# Altium PCB PCB_FOCShield.PcbDoc
Units mm, origin at the board's own origin, x right, y up, seen from the top; angles counter-clockwise.
Board outline 50.65 x 75.84 mm, 2 copper layers (Top Layer, Bottom Layer), stack 1.595 mm thick; 64 components, 48 nets, 242 pads, 252 vias.
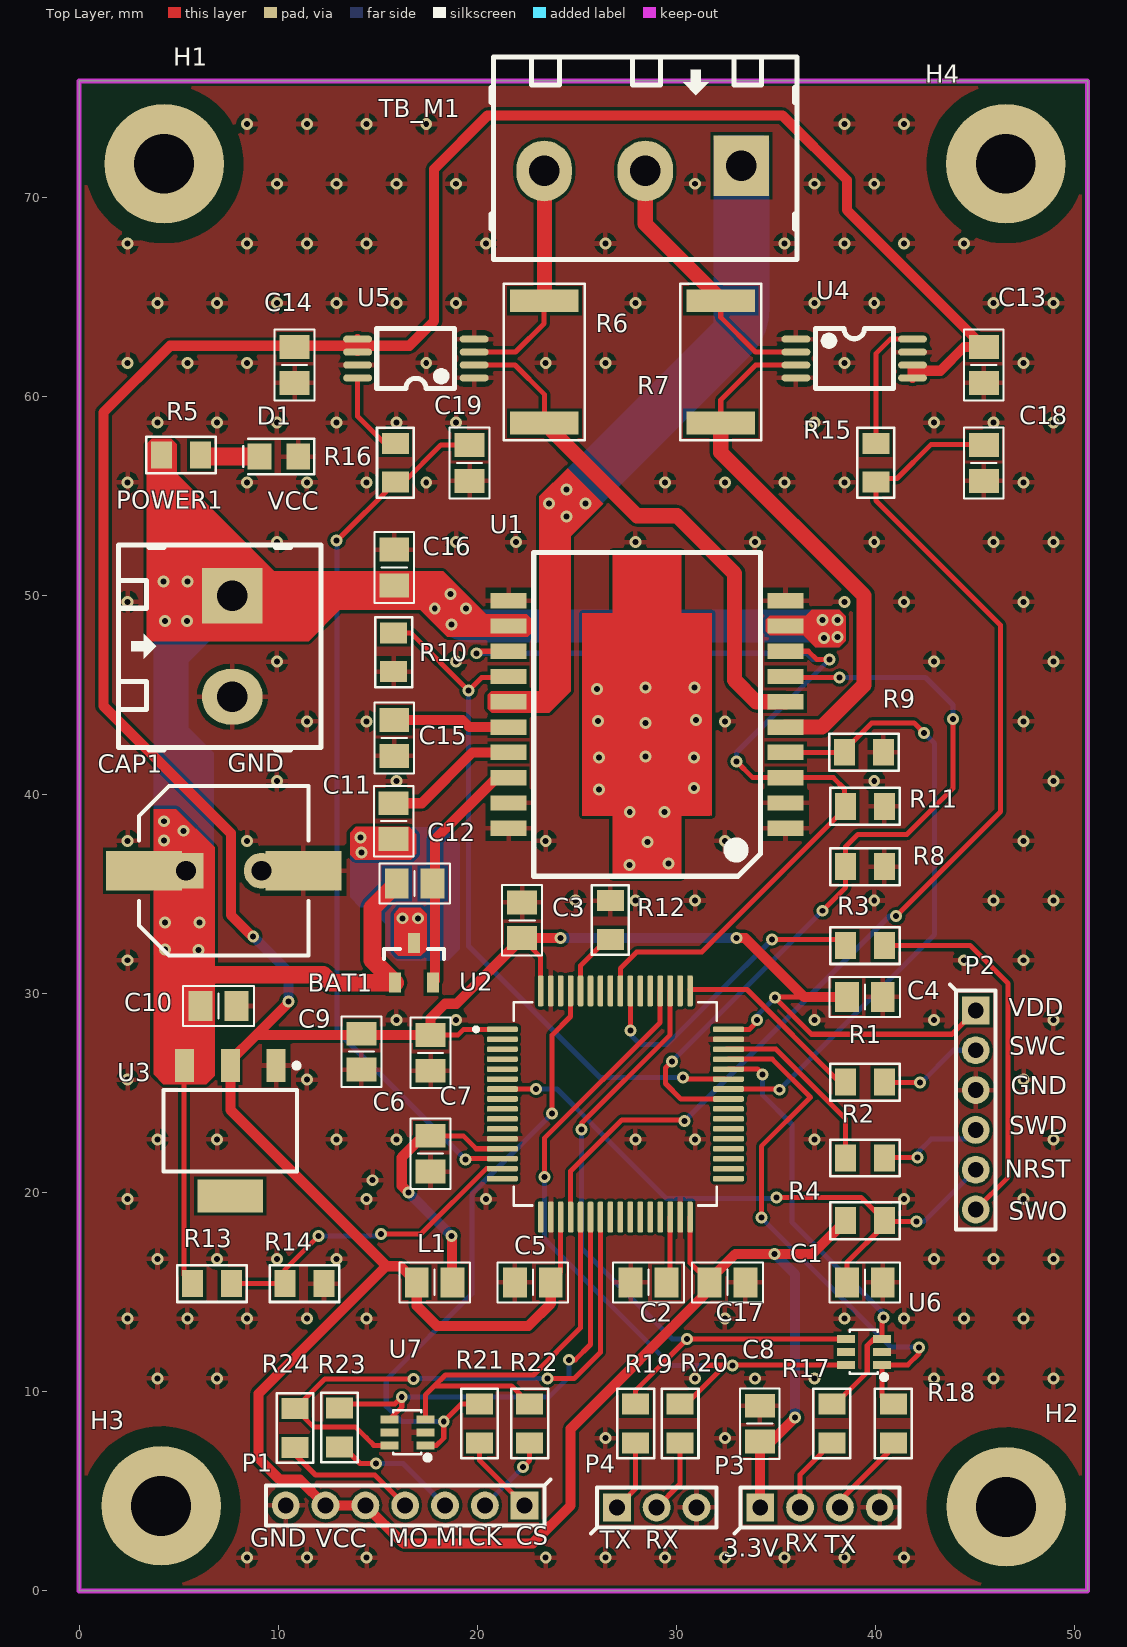
[diagram p0: Top Layer view]
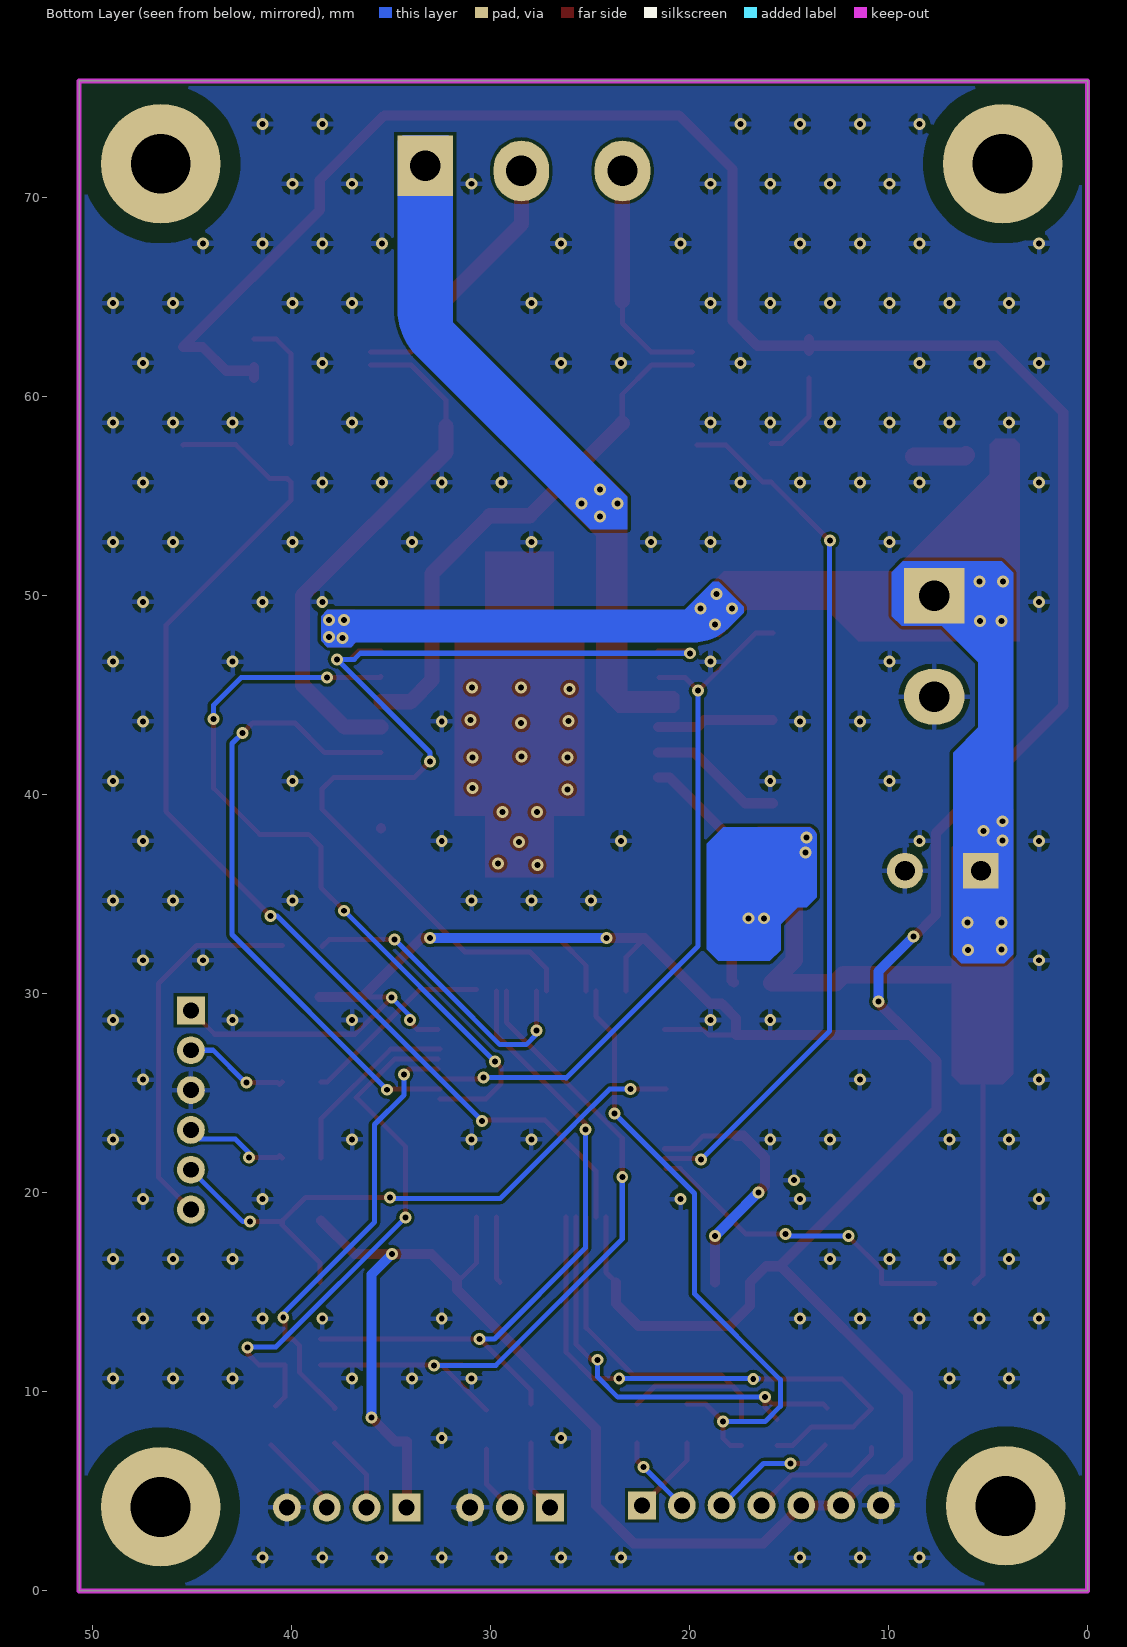
[diagram p1: Bottom Layer view, seen from below]

## Layer stack, top to bottom
Top Solder: solder mask 0.0356, Solder Resist, Dk 3.5
Top Layer: signal copper 0.0356
Dielectric 1: dielectric 1.524, FR-4, Dk 4.8
Bottom Layer: signal copper 0.0356
Bottom Solder: solder mask 0.0102, Solder Resist, Dk 3.5

## Board outline
0,0 0,75.844 50.648,75.844 50.648,0
cut-out: 50.648,71.882

## Design rules (kind name [scope] priority, off if disabled: settings)
Clearance [All] p1: gap=0.152 ignorepadtopadclearanceinfootprint=FALSE
HoleSize [All] p1: absolutevalues=TRUE maxlimit=3.81 minlimit=0.3 maxpercent=80.000 minpercent=20.000
MinimumSolderMaskSliver [All] p1: minsoldermaskwidth=0.015
PolygonConnect [All] p1: connectstyle=Relief reliefconductorwidth=0.254 reliefentries=4 polygonreliefangle="90 Angle" airgapwidth=0.254
RoutingVias [All] p1: holewidth=0.3 width=0.6 viastyle="Through Hole" minholewidth=0.25 minwidth=0.5 maxholewidth=0.4 maxwidth=0.8
SilkToSilkClearance [All] p1: silktosilkclearance=0.025
SilkToSolderMaskClearance [IsPad] p1: minsilkscreentomaskgap=0.051 clearancetoexposedcopper=TRUE
SolderMaskExpansion [All] p1: expansion=0.102
Width [All] p1: maxlimit=0.889 minlimit=0.203 preferedwidth=0.508
26 further rules are at their usual default settings.

## Components (designator, comment, footprint, x,y, rotation, side; value= is the part's Value field where it differs from the comment)
BAT1 "Diode Dual" SOT-23 16.815,31.547 r90 top
C1 "10nF" "C 0805" 39.46,15.495 r0 top
C2 "2.2uF" "C 0805" 28.6,15.495 r180 top
C3 "100nF" "C 0805" 22.25,33.682 r90 top
C4 "100nF" "C 0805" 39.46,29.833 r0 top
C5 "100nF" "C 0805" 22.785,15.495 r180 top
C6 "100nF" "C 0805" 17.653,27.026 r270 top
C7 "100nF" "C 0805" 17.653,21.956 r270 top
C8 "1uF" "C 0805" 34.188,8.396 r90 top
C9 "22uF" "C 0805" 14.179,27.081 r270 top
C10 "10uF" "C 0805" 7.003,29.376 r0 top
C11 "10nF" "C 0805" 15.799,38.659 r90 top
C12 "220nF" "C 0805" 16.851,35.53 r0 top
C13 "0.1uF" "C 0805" 45.439,61.573 r270 top
C14 "0.1uF" "C 0805" 10.82,61.573 r270 top
C15 "1uF" "C 0805" 15.824,42.839 r270 top
C16 "100nF" "C 0805" 15.824,51.395 r270 top
C17 "100nF" "C 0805" 32.563,15.495 r180 top
C18 "C" "C 0805" 45.439,56.647 r270 top
C19 "C" "C 0805" 19.609,56.647 r270 top
CAP1 "RVT" "C SMD ALU (F) DUAL" 7.264,36.17 r0 top
D1 "Led" "Led 0805 Blue" 10.029,56.972 r0 top
H1 "Screw Hole" SCREW/3.0/6.0 4.267,71.673 r0 top
H2 "Screw Hole" SCREW/3.0/6.0 46.558,4.216 r0 top
H3 "Screw Hole" SCREW/3.0/6.0 4.115,4.267 r0 top
H4 "Screw Hole" SCREW/3.0/6.0 46.542,71.673 r0 top
L1 "Inductor" "L 0805" 17.856,15.495 r0 top
P1 "Header 7" HDR/Header/7/2mm 16.378,4.293 r180 top
P2 "Header 6" HDR/Header/6/2mm 45.034,24.153 r270 top
P3 "Header 4" HDR/Header/4/2mm 37.211,4.191 r0 top
P4 "Header 3" HDR/Header/3/2mm 29.007,4.191 r0 top
POWER1 "Header 2" HDR/TERMINAL/2 7.696,47.447 r270 top
R1 "220" "R 0805" 39.472,25.552 r180 top
R2 "220" "R 0805" 39.472,21.742 r180 top
R3 "220" "R 0805" 39.472,32.411 r180 top
R4 "10k" "R 0805" 39.472,18.593 r180 top
R5 "2k" "R 0805" 5.121,57.048 r0 top
R6 "R" "R 2512" 23.368,61.722 r270 top
R7 "R" "R 2512" 32.227,61.722 r90 top
R8 "10k" "R 0805" 39.472,36.373 r0 top
R9 "10k" "R 0805" 39.421,42.117 r180 top
R10 "10k" "R 0805" 15.799,47.142 r90 top
R11 "4.7k" "R 0805" 39.472,39.401 r180 top
R12 "10K" "R 0805" 26.684,33.693 r270 top
R13 "12.4k" "R 0805" 6.676,15.434 r180 top
R14 "3.3k" "R 0805" 11.323,15.434 r0 top
R15 "R" "R 0805" 40.016,56.659 r270 top
R16 "R" "R 0805" 15.886,56.659 r270 top
R17 "R" "R 0805" 37.808,8.407 r270 top
R18 "R" "R 0805" 40.894,8.407 r270 top
R19 "R" "R 0805" 27.952,8.407 r270 top
R20 "R" "R 0805" 30.184,8.407 r270 top
R21 "R" "R 0805" 20.11,8.407 r270 top
R22 "R" "R 0805" 22.629,8.407 r270 top
R23 "R" "R 0805" 13.077,8.204 r270 top
R24 "R" "R 0805" 10.846,8.179 r270 top
TB_M1 "Header 3" HDR/TERMINAL/3 28.436,71.318 r180 top
U1 "L6234d" L6234 28.524,44.018 r90 top
U2 "STM32F446RET6" QFP50P1200X1200X160-64N 26.934,24.456 r0 top
U3 "AMS1117" SOT-223 7.595,23.107 r270 top
U4 "INA240A2PWR" INA240PD -417.795,490.323 r0 top
U5 "INA240A2PWR" INA240PD 473.64,-366.535 r180 top
U6 "UPC8172TB-E3-A" SOT-363_L2.0-W1.3-P0.65-LS2.1-BR_SMF05CT 39.438,11.887 r90 top
U7 "UPC8172TB-E3-A" SOT-363_L2.0-W1.3-P0.65-LS2.1-BR_SMF05CT 16.51,7.844 r90 top

## Footprints (in the part's own frame and the unit in brackets; to place one, negate y for a bottom-side part, rotate by r counter-clockwise, add the part's x,y. Pads: shape width x height; smd on the part's side, far side on the other; paste and mask are expansions set on the pad)
"C 0805" [mm]
  rect 1.2x1.5 smd: 1(-0.9,0) 2(0.9,0)
  silkscreen extent -1.78,-1 1.78,1, body extent -1,-0.64 1,0.61, height 0.6
"C SMD ALU (F) DUAL" [mm]
  rect 3.81x2 smd: 1(-4,0) 2(4,0)
  rect 1.8x1.8 hole 1: 1(-1.905,0)
  round 1.8 hole 1: 2(1.905,0)
  silkscreen extent -4.25,-4.25 4.25,4.25, body extent -4.95,-4.15 4.95,4.15, height 10.2
HDR/Header/3/2mm [mm]
  rect 1.4x1.4 hole 0.8: 1(-2,0)
  round 1.4 hole 0.8: 2(0,0) 3(2,0)
  silkscreen extent -3.3,-1.3 3,1, body extent -2.98,-1 2.97,1, height 6
HDR/Header/4/2mm [mm]
  rect 1.4x1.4 hole 0.8: 1(-3,0)
  round 1.4 hole 0.8: 2(-1,0) 3(1,0) 4(3,0)
  silkscreen extent -4.3,-1.3 4,1, body extent -3.98,-1 3.97,1, height 6
HDR/Header/6/2mm [mm]
  rect 1.4x1.4 hole 0.8: 1(-5,0)
  round 1.4 hole 0.8: 2(-3,0) 3(-1,0) 4(1,0) 5(3,0) 6(5,0)
  silkscreen extent -6.3,-1.3 6,1, body extent -5.97,-1 5.97,1, height 6
HDR/Header/7/2mm [mm]
  rect 1.4x1.4 hole 0.8: 1(-6,0)
  round 1.4 hole 0.8: 2(-4,0) 3(-2,0) 4(0,0) 5(2,0) 6(4,0) 7(6,0)
  silkscreen extent -7.3,-1.3 7,1, body extent -6.97,-1 6.97,1, height 6
HDR/TERMINAL/2 [mil] "Header 2, 2 pin, hight 400mil, Pin to Pin 200mil, Colour Green"
  rect 110x120 hole 60: 1(-100,0)
  oval 110x120 hole 60: 2(100,0)
  silkscreen extent -200,-225 205,175, body extent -240,-176 190,210, height 559
HDR/TERMINAL/3 [mil]
  rect 110x120 hole 60: 1(-190,-10)
  oval 110x120 hole 60: 2(0,0) 3(200,0)
  silkscreen extent -300,-225 305,175, body extent -320,-190 310,196, height 559
INA240PD [mm]
  oval 1.454x0.353 smd paste+0 mask+0.051: 1(453.798,-427.454) 2(453.798,-428.104) 3(453.798,-428.754) 4(453.798,-429.404) 5(459.652,-429.404) 6(459.652,-428.754) 7(459.652,-428.104) 8(459.652,-427.454)
  silkscreen extent 454.79,-429.93 458.69,-426.93, body extent 453.53,-430 459.93,-427, height 1.2
L6234 [mm]
  rect 0.772x1.8 smd paste+0 mask+0.051: 1(-5.715,-6.955) 2(-4.445,-6.958) 3(-3.175,-6.958) 4(-1.905,-6.958) 5(-0.635,-6.958) 6(0.635,-6.958) 7(1.905,-6.958) 8(3.175,-6.958) 9(4.445,-6.958) 10(5.715,-6.955) 11(5.715,6.955) 12(4.445,6.958) 13(3.175,6.958) 14(1.905,6.958) 15(0.635,6.958) 16(-0.635,6.958) 17(-1.905,6.958) 18(-3.175,6.958) 19(-4.445,6.958) 20(-5.715,6.955)
  Top Layer region: 5.082,-1.727 5.082,-3.249 -5.082,-3.249 -5.082,-3.141 -5.08,-3.141 -5.08,-1.727 -8.178,-1.727 -8.178,1.725 -5.08,1.725 -5.08,3.249 5.079,3.249 5.079,1.725 8.178,1.725 8.178,-1.727
  silkscreen extent -8.13,-5.69 8.13,5.69, body extent -8,-7.2 8,7.2, height 3.6
"L 0805" [mm] "Chip Capacitor, 2-Leads, Body 2.0x1.3mm, IPC Medium Density"
  rect 1.2x1.5 smd: 1(-0.9,0) 2(0.9,0)
  silkscreen extent -1.78,-1 1.78,1, body extent -1,-0.6 1,0.6, height 0.95
"Led 0805 Blue" [mm]
  rect 1.2x1.3 smd: 1(-0.975,0) 2(0.975,0)
  silkscreen extent -1.78,-0.89 1.78,0.89, body extent -1.01,-0.62 1.01,0.63, height 1.1
QFP50P1200X1200X160-64N [mm]
  rrect50% 1.56x0.28 smd: 1(-5.68,3.75) 2(-5.68,3.25) 3(-5.68,2.75) 4(-5.68,2.25) 5(-5.68,1.75) 6(-5.68,1.25) 7(-5.68,0.75) 8(-5.68,0.25) 9(-5.68,-0.25) 10(-5.68,-0.75) 11(-5.68,-1.25) 12(-5.68,-1.75) 13(-5.68,-2.25) 14(-5.68,-2.75) 15(-5.68,-3.25) 16(-5.68,-3.75) 33(5.68,-3.75) 34(5.68,-3.25) 35(5.68,-2.75) 36(5.68,-2.25) 37(5.68,-1.75) 38(5.68,-1.25) 39(5.68,-0.75) 40(5.68,-0.25) 41(5.68,0.25) 42(5.68,0.75) 43(5.68,1.25) 44(5.68,1.75) 45(5.68,2.25) 46(5.68,2.75) 47(5.68,3.25) 48(5.68,3.75)
  rrect50% 0.28x1.56 smd: 17(-3.75,-5.68) 18(-3.25,-5.68) 19(-2.75,-5.68) 20(-2.25,-5.68) 21(-1.75,-5.68) 22(-1.25,-5.68) 23(-0.75,-5.68) 24(-0.25,-5.68) 25(0.25,-5.68) 26(0.75,-5.68) 27(1.25,-5.68) 28(1.75,-5.68) 29(2.25,-5.68) 30(2.75,-5.68) 31(3.25,-5.68) 32(3.75,-5.68) 49(3.75,5.68) 50(3.25,5.68) 51(2.75,5.68) 52(2.25,5.68) 53(1.75,5.68) 54(1.25,5.68) 55(0.75,5.68) 56(0.25,5.68) 57(-0.25,5.68) 58(-0.75,5.68) 59(-1.25,5.68) 60(-1.75,5.68) 61(-2.25,5.68) 62(-2.75,5.68) 63(-3.25,5.68) 64(-3.75,5.68)
  silkscreen extent -7.1,-5.1 5.1,5.1, body extent -6,-6.03 6,5.97, height 1.48
"R 0805" [mm]
  rect 1.05x1.35 smd: 1(-0.975,0) 2(0.975,0)
  silkscreen extent -1.75,-0.92 1.75,0.92, body extent -1,-0.61 1,0.59, height 0.5
"R 2512" [mm]
  rect 1.15x3.45 smd: 1(-3.075,0) 2(3.075,0)
  silkscreen extent -3.94,-2.03 3.94,2.03, body extent -3.2,-1.6 3.2,1.6, height 0.76
SCREW/3.0/6.0 [mm]
  round 6 hole 3: 1(0,0)
  Top Layer pour cut-out: -4,0 -3.696,1.531 -2.828,2.828 -1.531,3.695 0,4 0,4 1.531,3.695 2.828,2.828 3.695,1.531 4,0 4,0 3.696,-1.531 2.828,-2.828 1.531,-3.696 0,-4 0,-4 -1.531,-3.696 -2.828,-2.828 -3.696,-1.531 -4,0
  Bottom Layer pour cut-out: -4,0 -3.696,1.531 -2.828,2.828 -1.531,3.695 0,4 0,4 1.531,3.695 2.828,2.828 3.695,1.531 4,0 4,0 3.696,-1.531 2.828,-2.828 1.531,-3.696 0,-4 0,-4 -1.531,-3.696 -2.828,-2.828 -3.696,-1.531 -4,0
SOT-23 [mm]
  rect 1x0.6 smd: 1(-1,0.95) 2(-1,-0.95) 3(1,0)
  silkscreen extent 0.2,-1.5 0.7,1.5, body extent -1.28,-1.46 1.27,1.46, height 0.95
SOT-223 [mm]
  rect 1.65x0.95 smd: 1(-3.275,2.3) 2(-3.275,0) 3(-3.275,-2.3)
  rect 1.65x3.3 smd: 4(3.275,0)
  silkscreen extent -3.4,-3.35 2.05,3.45, body extent -3.5,-3.25 3.5,3.25, height 1.64
SOT-363_L2.0-W1.3-P0.65-LS2.1-BR_SMF05CT [mm]
  rect 0.4x0.9 smd paste+0 mask+0.051: 1(-0.533,-0.877) 2(0.117,-0.877) 3(0.767,-0.877) 4(-0.533,0.923) 5(0.117,0.923) 6(0.767,0.923)
  silkscreen extent -1.28,-1.12 1.22,0.72, body extent -0.88,-1.05 1.12,1.05, height 0.2

## Part data
BAT1: "Dual Default Diode"
C1 C2 C3 C4 C5 C6 C7 C8 C9 C10 C11 C12 C13 C14 C15 C16 C17 C18 C19: library part "Capacitor NP", "Capacitor non-pol"
CAP1: library part Capacitor, "Capacitor pol"
D1: "Typical LED"
P1: "Header, 7-Pin"
P2: "Header, 6-Pin"
P3: "Header, 4-Pin"
P4 TB_M1: "Header, 3-Pin"
POWER1: "Header, 2-Pin"
R1 R2 R3 R4 R5 R6 R7 R8 R9 R10 R11 R12 R13 R14 R15 R16 R17 R18 R19 R20 R21 R22 R23 R24: library part Resistor, "Resistor"
U2: "MCU 32-Bit STM32 ARM Cortex M4 RISC 512KB Flash 2.5V/3.3V 64-Pin LQFP Tray", PACKAGE=None, Availability=Unavailable, MP=STM32F446RET6, Price=None
U3: "1A LDO Voltage Regulator, ADJ or fixed 1.5/1.8/2.5/2.85/3.3/5V"
H1 H2 H3 H4: TYPE=NO-BOM, UNIT PRICE=0

## Via types
v1: diameter 0.6, hole 0.3, Top Layer to Bottom Layer, tented both sides, 252 vias

## Nets (pads, with @x,y where several pads share a name; then routed paths per layer and width w, separated by ;. In a path a pad name is that pad's centre, name@x,y a point inside that pad or via, vN(x,y) a via of type N, cw(c..) or ccw(c..) an arc to the next point about the centre after c; other vN are vias at no path point)
+8: BAT1.1 C10.1 C12.1 C16.2 CAP1.1 POWER1.1 R5.1 R13.2 U1.9 U1.12 U3.3 | length 28.4
  Top Layer w0.254: U3.3@5.26,26.42 5.26,15.875 R13.2
  Top Layer w0.508: U1.12 U1.12@21.648,48.382
  Top Layer w0.889: CAP1.1@5.359,36.17 CAP1.1@5.365,36.164 ; C10.1 6.103,30.371 6.676,30.944 12.259,30.944 12.657,30.547 BAT1.1 14.732,31.68 14.732,34.31 C12.1
  other v1: 5.994,32.182 4.31,32.207 4.318,33.579 6.036,33.579 4.267,37.694 5.232,38.176 4.267,38.655 37.413,47.859 38.1,47.904 18.704,48.539 4.318,48.717 5.41,48.717 37.338,48.768 38.1,48.768 17.862,49.333 19.435,49.333 18.644,50.062 4.242,50.698 5.436,50.698
A0: C19.1 R16.2 U2.14 | length 44.3
  Top Layer w0.254: v1(12.929,52.756) 12.958,52.756 R16.2 16.302,55.684 18.166,57.547 C19.1 ; v1(19.406,21.666) 19.446,21.706 U2.14
  Bottom Layer w0.254: v1(12.929,52.756) 12.954,52.73 12.954,28.118 v1(19.406,21.666)
A1: R13.1 R14.1 U2.15 | length 16.3
  Top Layer w0.254: R13.1 R14.1 10.348,16.15 v1(12.014,17.816) ; v1(15.164,17.932) 17.176,17.932 20.45,21.206 U2.15@21.162,21.206
  Bottom Layer w0.254: v1(12.014,17.816) 15.047,17.816 v1(15.164,17.932)
A2: C18.1 R15.2 U2.20 | length 56.8
  Top Layer w0.254: U2.20 24.684,21.077 27.258,23.651 30.348,23.651 v1(30.404,23.595) ; v1(41.037,33.893) 46.279,39.135 46.279,48.5 40.016,54.763 R15.2 40.207,55.875 41.079,55.875 42.775,57.57 45.416,57.57 C18.1
  Bottom Layer w0.254: v1(30.404,23.595) 30.404,23.6 40.697,33.893 v1(41.037,33.893)
CS: R21.1 U2.61 U7.1 | length 32
  Top Layer w0.254: U7.1 17.953,7.311 18.313,7.671 v1(18.313,8.509) 19.187,9.382 R21.1 ; v1(23.758,23.978) 23.758,27.922 24.684,28.848 U2.61
  Bottom Layer w0.254: v1(18.313,8.509) 16.188,8.509 15.427,9.271 15.427,10.61 19.736,14.919 19.736,19.956 v1(23.758,23.978)
EN2: R11.2 U1.3 U1.8 U1.13 U2.56 | length 51.7
  Top Layer w0.203: v1(19.969,47.092) v1@20.071,47.193
  Top Layer w0.254: v1@20.071,47.193 U1.13 ; U2.56 27.184,31.263 28.005,32.084 31.272,32.084 38.446,39.258 38.446,40.273 37.876,40.843 U1.3 33.833,40.843 v1(33.02,41.656) ; U1.8 36.627,47.193 37.033,46.787 v1(37.696,46.787)
  Bottom Layer w0.254: v1(19.969,47.092) 36.525,47.092 36.83,46.787 v1(37.696,46.787) 33.02,42.111 v1(33.02,41.656)
GND: C1.2 C2.2 C3.2 C4.2 C5.2 C6.2 C7.2 C8.2 C9.2 C10.2 C13.2 C14.2 C15.2 C16.1 C17.1 C18.2 C19.2 CAP1.2 D1.2 P1.7 P2.3 P3.4 P4.3 POWER1.2 R8.2 R9.1 R10.1 R11.1 R12.1 R14.2 U1.1 U1.2 U1.10 U1.11 U1.19 U1.20 U2.12 U2.18 U2.31 U2.47 U2.63 U3.1 U4.1 U4.4 U4.7 U5.1 U5.4 U5.7 U6.2 U7.2 | length 0
  Top Layer w0.508: U1.1 U1.1@35.482,38.306
  other v1: 8.435,1.673 11.435,1.673 14.435,1.673 23.435,1.673 26.435,1.673 29.435,1.673 32.435,1.673 35.435,1.673 38.435,1.673 41.435,1.673 26.435,7.673 32.435,7.673 3.935,10.673 6.935,10.673 30.935,10.673 33.935,10.673 36.935,10.673 42.935,10.673 45.935,10.673 48.935,10.673 2.435,13.673 5.435,13.673 8.435,13.673 11.435,13.673 14.435,13.673 32.435,13.673 38.435,13.673 41.435,13.673 44.435,13.673 47.435,13.673 3.935,16.673 6.935,16.673 9.935,16.673 12.935,16.673 42.935,16.673 45.935,16.673 48.935,16.673 2.435,19.673 14.435,19.673 20.435,19.673 41.435,19.673 47.435,19.673 14.738,20.625 3.935,22.673 6.935,22.673 12.935,22.673 15.935,22.673 27.935,22.673 30.935,22.673 36.935,22.673 48.935,22.673 2.435,25.673 11.435,25.673 47.435,25.673 15.935,28.673 18.935,28.673 36.935,28.673 42.935,28.673 48.935,28.673 2.435,31.673 44.435,31.673 47.435,31.673 24.935,34.673 27.935,34.673 30.935,34.673 39.935,34.673 45.935,34.673 48.935,34.673 2.435,37.673 8.435,37.673 23.435,37.673 32.435,37.673 47.435,37.673 9.935,40.673 15.935,40.673 39.935,40.673 48.935,40.673 11.435,43.673 14.435,43.673 32.435,43.673 47.435,43.673 9.935,46.673 18.935,46.673 42.935,46.673 48.935,46.673 2.435,49.673 38.435,49.673 41.435,49.673 47.435,49.673 9.935,52.673 18.935,52.673 21.935,52.673 27.935,52.673 33.935,52.673 39.935,52.673 45.935,52.673 48.935,52.673 2.435,55.673 8.435,55.673 11.435,55.673 14.435,55.673 17.435,55.673 29.435,55.673 32.435,55.673 35.435,55.673 38.435,55.673 47.435,55.673 3.935,58.673 6.935,58.673 9.935,58.673 12.935,58.673 15.935,58.673 18.935,58.673 36.935,58.673 42.935,58.673 45.935,58.673 48.935,58.673 2.435,61.673 5.435,61.673 8.435,61.673 17.435,61.673 23.435,61.673 26.435,61.673 38.435,61.673 47.435,61.673 3.935,64.673 6.935,64.673 9.935,64.673 12.935,64.673 15.935,64.673 18.935,64.673 27.935,64.673 36.935,64.673 39.935,64.673 45.935,64.673 48.935,64.673 2.435,67.673 8.435,67.673 11.435,67.673 14.435,67.673 20.435,67.673 26.435,67.673 35.435,67.673 38.435,67.673 41.435,67.673 44.435,67.673 9.935,70.673 12.935,70.673 15.935,70.673 18.935,70.673 30.935,70.673 36.935,70.673 39.935,70.673 8.435,73.673 11.435,73.673 14.435,73.673 17.435,73.673 38.435,73.673 41.435,73.673
MISO: R23.1 U2.22 U7.6 | length 22.2
  Top Layer w0.254: R23.1 13.28,9.382 15.858,9.382 v1(16.204,9.728) 16.204,9.228 U7.6 ; v1(24.614,11.608) 24.922,11.608 25.684,12.37 U2.22
  Bottom Layer w0.254: v1(16.204,9.728) 23.593,9.728 24.614,10.749 v1(24.614,11.608)
MOSI: R24.1 U2.23 U7.4 | length 29.9
  Top Layer w0.254: 14.427,7.696 14.813,7.311 ; U7.4 14.813,7.311 ; v1(16.789,10.652) 12.344,10.652 R24.1 11.763,8.237 13.868,8.237 14.794,7.311 14.813,7.311 ; v1(23.52,10.666) 24.864,10.666 26.184,11.985 U2.23
  Bottom Layer w0.254: v1(16.789,10.652) 16.609,10.652 16.573,10.617 16.525,10.666 v1(23.52,10.666)
NetBAT1_3: BAT1.3 C11.1 | length 0.1
  Bottom Layer w0.508: v1@16.967,33.782 v1(17.018,33.782)
  other v1: 16.251,33.782 14.173,37.084 14.123,37.846
NetC2_1: C2.1 U2.30 | length 3.4
  Top Layer w0.254: C2.1 29.684,15.679 U2.30
NetC15_1: C15.1 U1.16 | length 5.9
  Top Layer w0.508: C15.1 19.253,43.739 19.609,43.383 U1.16
NetD1_1: D1.1 R5.2 | length 2.6
  Top Layer w0.889: R5.2 6.172,56.972 D1.1@8.712,56.972
NetP1_1: P1.1 R21.2 | length 4.1
  Top Layer w0.254: R21.2 20.11,6.56 P1.1
NetP1_2: P1.2 R22.2 | length 4.1
  Top Layer w0.254: v1(22.301,6.224) 22.629,6.552 R22.2
  Bottom Layer w0.254: P1.2 20.378,4.3 v1(22.301,6.224)
NetP1_3: P1.3 R23.2 | length 6.5
  Top Layer w0.254: R23.2@13.179,7.331 14.109,6.401 v1(14.91,6.401)
  Bottom Layer w0.254: v1(14.91,6.401) 16.269,6.401 P1.3
NetP1_4: P1.4 R24.2 | length 6.9
  Top Layer w0.254: R24.2 10.846,6.848 11.873,5.821 14.849,5.821 P1.4
NetP2_2: P2.2 R1.1 | length 5.5
  Top Layer w0.254: R1.1 40.574,25.425 40.675,25.527 v1(42.24,25.527) ; P2.2@44.882,27 P2.2@44.882,27.153
  Bottom Layer w0.254: v1(42.24,25.527) 42.29,25.527 43.915,27.153 P2.2
NetP2_4: P2.4 R2.1 | length 5.4
  Top Layer w0.254: R2.1 40.574,21.869 40.675,21.768 v1(42.113,21.768)
  Bottom Layer w0.254: v1(42.113,21.768) 42.113,22.004 42.798,22.689 44.57,22.689 P2.4
NetP2_6: P2.6 R3.1 | length 19
  Top Layer w0.254: R3.1 44.754,32.411 46.66,30.505 46.66,20.778 P2.6
NetP3_2: P3.2 R17.2 | length 3.9
  Top Layer w0.254: P3.2 36.211,5.836 R17.2
NetP3_3: P3.3 R18.2 | length 4.3
  Top Layer w0.254: P3.3 38.211,4.538 R18.2@40.999,7.327
NetP4_1: P4.1 R19.2 | length 3.6
  Top Layer w0.254: P4.1 27.952,5.137 R19.2
NetP4_2: P4.2 R20.2 | length 3.4
  Top Layer w0.254: P4.2 30.184,5.368 R20.2@30.184,7.128
NetR12_2: R12.2 U2.60 | length 3.3
  Top Layer w0.254: U2.60 25.184,31.401 26.501,32.718 R12.2
NetR15_1: R15.1 U4.8 | length 6.6
  Top Layer w0.254: R15.1 40.016,62.141 40.743,62.868 U4.8
NetR16_1: R16.1 U5.8 | length 4.4
  Top Layer w0.254: U5.8 13.988,58.987 15.341,57.634 R16.1
NRST: C1.1 P2.5 R4.1 U2.7 | length 31.6
  Top Layer w0.254: U2.7@21.162,25.206 U2.7 v1(22.956,25.206) ; v1(35.027,19.761) 39.278,19.761 R4.1 ; C1.1 38.56,16.487 40.447,18.374 R4.1 ; v1(42.062,18.542) 40.497,18.542 R4.1
  Bottom Layer w0.254: v1(22.956,25.206) 24,25.206 25.802,23.405 25.802,23.397 29.492,19.706 34.972,19.706 v1(35.027,19.761) ; v1(42.062,18.542) 42.424,18.542 P2.5
PA11: R17.1 U2.44 U6.3 | length 22.4
  Top Layer w0.254: U2.44 34.078,26.206 34.332,25.952 v1(34.332,25.944) ; R17.1@37.808,9.171 37.808,9.207 39.585,10.985 39.585,12.32 39.919,12.654 U6.3 40.315,13.646 v1(40.396,13.727)
  Bottom Layer w0.254: v1(34.332,25.944) 34.332,24.896 35.81,23.419 35.81,18.521 40.396,13.935 v1(40.396,13.727)
PA12: R18.1 U2.45 U6.1 | length 27.6
  Top Layer w0.254: U2.45 34.813,26.706 36.728,24.79 34.265,22.327 v1(34.265,18.745) ; R18.1@40.789,9.277 40.315,9.751 U6.1 41.622,11.354 42.189,11.921 v1(42.189,12.228)
  Bottom Layer w0.254: v1(34.265,18.745) 40.754,12.255 42.346,12.255 42.319,12.228 v1(42.189,12.228)
PC10: R19.1 U2.51 U6.6 | length 34.3
  Top Layer w0.254: v1(25.222,23.165) 25.222,23.475 29.684,27.936 U2.51 ; R19.1 27.952,10.077 v1(30.529,12.654) U6.6
  Bottom Layer w0.254: v1(25.222,23.165) 25.222,17.221 29.79,12.654 v1(30.529,12.654)
PC11: R20.1 U2.52 U6.4 | length 38.7
  Top Layer w0.254: v1(23.368,20.794) 23.368,22.733 29.184,28.549 U2.52 ; R20.1@30.184,9.078 32.46,11.354 ; v1(32.817,11.328) 31.445,11.328 31.42,11.354 32.46,11.354 ; U6.4 38.12,11.354 32.46,11.354
  Bottom Layer w0.254: v1(23.368,20.794) 23.368,17.678 29.718,11.328 v1(32.817,11.328)
PhA: R6.1 TB_M1.3 U5.3 | length 12.1
  Top Layer w0.254: U5.3 21.917,62.22 23.356,63.658 R6.1@23.356,64.809
  Top Layer w0.508: TB_M1.3@23.165,71.127 TB_M1.3
  Top Layer w0.762: TB_M1.3 23.368,71.306 R6.1
PhA_CS: R6.2 U1.6 U5.2 | length 26.6
  Top Layer w0.254: U5.2 21.895,61.57 23.368,60.096 R6.2
  Top Layer w0.762: R6.2 28.015,54 30.023,54 32.918,51.105 32.918,45.744 34.009,44.653 U1.6
PhB: R7.2 TB_M1.2 U4.2 | length 13.4
  Top Layer w0.254: R7.2@32.227,64.869 R7.2 32.227,63.963 33.971,62.218 U4.2
  Top Layer w0.762: TB_M1.2 28.436,68.66 R7.2@32.227,64.869
PhB_CS: R7.1 U1.5 U4.3 | length 26.6
  Top Layer w0.254: R7.1@32.227,58.495 R7.1 32.227,59.811 33.984,61.568 U4.3
  Top Layer w0.762: R7.1@32.227,58.495 32.227,57.181 39.421,49.987 39.421,45.489 37.315,43.383 U1.5
PhC: TB_M1.1 U1.15
  other v1: 24.486,53.95 23.597,54.61 25.425,54.61 24.486,55.321
PWM1: R8.1 U1.7 U2.41 | length 38.8
  Top Layer w0.254: v1(29.769,26.59) 29.448,26.269 29.448,25.478 30.219,24.706 U2.41@32.522,24.706 ; U1.7 35.533,45.872 v1(38.195,45.872) ; v1(37.338,34.159) 38.497,35.318 R8.1 38.497,37.374 39.119,37.996 41.579,37.996 43.891,40.308 v1(43.891,43.798)
  Bottom Layer w0.254: v1(29.769,26.59) v1(37.338,34.159) ; v1(38.195,45.872) 42.511,45.872 43.891,44.492 v1(43.891,43.798)
PWM2: R9.2 U1.4 U2.42 | length 31.8
  Top Layer w0.254: U2.42@32.522,25.206 U2.42 35.143,25.206 v1(35.179,25.17) ; U1.4 38.332,42.113 39.805,43.586 41.939,43.586 v1(42.435,43.09)
  Bottom Layer w0.254: v1(35.179,25.17) 42.971,32.962 42.971,42.554 v1(42.435,43.09)
PWM3: R10.2 U1.14 U2.43 | length 35.8
  Top Layer w0.254: R10.2 16.653,48.117 v1(19.558,45.212) 20.218,45.872 U1.14@21.516,45.872 ; v1(30.328,25.781) 30.402,25.706 U2.43@32.522,25.706
  Bottom Layer w0.254: v1(19.558,45.212) 19.558,32.387 26.182,25.763 26.2,25.781 v1(30.328,25.781)
SCK: R22.1 U2.21 U7.3 | length 21.8
  Top Layer w0.254: U7.3 17.387,9.833 ; R22.1 21.725,10.287 17.841,10.287 ; U2.21 25.184,13.213 22.817,10.846 18.399,10.846 17.841,10.287 ; 17.387,9.833 17.841,10.287 ; 17.387,9.833 17.387,9.841 17.833,10.287 17.841,10.287
SWCLK: R1.2 U2.49 | length 9.7
  Top Layer w0.254: U2.49@30.684,30.201 33.546,30.201 38.195,25.552 R1.2
SWDIO: R2.2 U2.46 | length 9.4
  Top Layer w0.254: U2.46@32.522,27.206 U2.46 34.998,27.206 38.497,23.708 R2.2
SWO: R3.2 U2.55 | length 15.6
  Top Layer w0.254: U2.55 27.684,28.111 v1@27.686,28.108 ; v1(27.686,28.143) v1@27.686,28.108 ; v1(34.799,32.715) 38.09,32.715 R3.2@38.446,32.36 ; v1@27.686,28.108 27.702,28.092 27.686,28.076 v1@27.686,28.108
  Bottom Layer w0.254: v1(27.686,28.143) 27.686,27.943 28.197,27.432 29.515,27.432 32.107,30.023 v1(34.799,32.715)
VBOOT: BAT1.2 C12.2 U1.18 | length 12.2
  Top Layer w0.508: BAT1.2 17.867,30.649 17.867,35.204 17.867,37.735 20.976,40.843 U1.18
VCP: C11.2 U1.17 | length 6.8
  Top Layer w0.508: C11.2 17.207,39.559 19.761,42.113 U1.17
VDD: C3.1 C4.1 C5.1 C6.1 C8.1 C9.1 C13.1 C14.1 C17.2 L1.1 P1.5 P1.6 P2.1 P3.1 R4.2 U2.1 U2.19 U2.32 U2.48 U2.64 U3.2 U4.5 U4.6 U5.5 U5.6 | length 259.3
  Top Layer w0.254: C6.1 17.667,27.911 19.021,27.911 19.316,28.206 U2.1 ; C3.1@22.25,32.761 23.184,31.827 U2.64 ; C5.1 24.184,15.994 U2.19 ; U2.32 30.684,16.475 C17.2 ; U2.48 33.672,28.206 34.036,28.57 v1(34.036,28.677) ; v1@34.822,29.795 v1(34.947,29.795) 36.786,27.956 43.838,27.956 P2.1 ; v1@34.86,29.833 36.402,29.833
  Top Layer w0.508: v1(8.745,32.868) 8.694,32.868 7.62,33.942 7.62,38.049 1.219,44.45 1.219,59.182 4.572,62.535 13.988,62.535 ; v1(10.508,29.608) 10.546,29.57 8.886,27.911 ; U5.6@13.988,62.27 13.988,62.535 ; U5.5 13.988,62.535 ; C6.1@17.653,27.911 8.886,27.911 ; C6.1 17.653,28.767 18.376,29.489 18.958,29.489 C3.1@22.229,32.761 ; C3.1@22.25,32.761 C3.1@22.229,32.761 ; C5.1 23.685,14.425 22.572,13.312 17.96,13.312 16.956,14.317 L1.1 16.145,16.307 15.455,16.307 ; v1(24.167,32.782) C3.1 C3.1@22.229,32.761 ; v1(33.02,32.782) 33.453,32.782 36.402,29.833 C4.1 ; P3.1 34.188,4.214 C8.1 34.754,7.496 v1(35.964,8.705) ; R4.2 36.82,16.916 v1(34.933,16.916) 32.959,16.916 31.663,15.62 C17.2 31.663,15.117 24.689,8.143 24.689,4.287 22.789,2.388 16.283,2.388 P1.5 P1.6 11.082,5.588 10.08,5.588 9.017,6.651 9.017,9.913 15.411,16.307 15.455,16.307 ; U4.5 41.857,61.284 ; U4.6@41.857,61.464 41.857,61.284 ; 8.886,27.911 7.595,26.619 U3.2 7.595,24.167 15.455,16.307 ; 13.988,62.535 16.584,62.535 17.831,63.781 17.831,71.417 20.522,74.108 35.315,74.108 38.564,70.859 38.564,69.348 C13.1 44.448,62.473 43.258,61.284 41.857,61.284
  Bottom Layer w0.254: v1(34.036,28.677) 34.036,28.885 v1(34.947,29.795)
  Bottom Layer w0.508: v1(8.745,32.868) 10.508,31.105 v1(10.508,29.608) ; v1(24.167,32.782) v1(33.02,32.782) ; v1(34.933,16.916) 35.964,15.886 v1(35.964,8.705)
VDDA: C7.1 L1.2 U2.13 | length 13.1
  Top Layer w0.254: C7.1 19.294,22.856 19.944,22.206 U2.13
  Top Layer w0.508: v1(16.535,20.015) 16.205,20.345 16.205,21.774 17.287,22.856 C7.1 ; v1(18.704,17.831) 18.719,17.816 L1.2@18.719,15.495
  Bottom Layer w0.508: v1(16.535,20.015) 17.209,19.342 17.209,19.326 v1(18.704,17.831)
pads on no net: H1.1 H2.1 H3.1 H4.1 U2.2 U2.3 U2.4 U2.5 U2.6 U2.8 U2.9 U2.10 U2.11 U2.16 U2.17 U2.24 U2.25 U2.26 U2.27 U2.28 U2.29 U2.33 U2.34 U2.35 U2.36 U2.37 U2.38 U2.39 U2.40 U2.50 U2.53 U2.54 U2.57 U2.58 U2.59 U2.62 U3.4 U6.5 U7.5
copper on no net: | length 0.1
  Top Layer w0.508: v1@27.635,36.424 v1(27.635,36.449) ; v1@28.448,45.344 v1(28.448,45.364) ; v1@30.886,45.385 v1(30.907,45.364)
  other v1: 29.605,36.525 28.55,37.621 27.655,39.116 29.393,39.116 26.111,40.249 30.886,40.335 26.111,41.859 30.889,41.859 28.436,41.91 28.448,43.586 26.06,43.688 30.988,43.734 26.01,45.298

## Polygon pours and split planes (outlines as drawn)
GND on Bottom Layer "Bottom Layer-GND" (solid, remove dead copper, pour order 6): 50.648,75.844 50.648,16.235 50.648,0.025 0,0.025 0,75.844
GND on Top Layer "Top Layer-GND" (solid, remove dead copper, pour order 8): 0,75.844 0.085,75.929 50.563,75.929 50.796,75.696 50.796,-0.025 0,-0.025 0,70.591

## Keep-outs
Keep-Out Layer:
  lines w0.254: 0,0 50.648,0 50.648,30.52 50.648,54.742 50.648,75.844 46.685,75.844 0,75.844 0,0

## Other copper
Top Layer:
  region net +8: 5.231,34.138
  region net +8: 3.741,39.268 4.877,39.268 6.807,37.338 6.807,25.883 6.381,25.456 4.235,25.456 3.741,25.95
  region net PhC: 20.514,45 20.706,45.191 20.719,45.177 23.115,45.177 23.115,54.966 24.537,56.388 26.314,54.61 24.685,52.98 24.685,45.177 23.622,44.115 20.712,44.115 20.514,44.313
  region net +8: 3.404,57.607 3.404,47.701 11.527,47.701 13.102,49.276 17.133,49.276 18.479,47.93 22.543,47.93 22.758,48.145 22.758,48.781 22.489,49.05 20.439,49.05 18.283,51.206 9.804,51.206 4.902,56.109 4.902,57.582 4.623,57.861 3.658,57.861
  region net PhB_CS: 31.344,57.506
  region net GND: 38.857,51.46
  region net GND: 32.156,50.495
  region net GND: 36.576,45.04
  region net NetBAT1_3: 13.884,38.366 16.574,38.366 16.944,37.996 16.942,37.017 16.653,36.728 13.866,36.728 13.612,36.981 13.606,38.086
  region net GND: 13.599,38.366
  region net GND: 33.68,62.394
  region net PhC: 23.114,56.794
  region net NetBAT1_3: 17.449,32.18 17.449,34.011 17.15,34.31 16.073,34.31 15.824,34.002 15.824,33.579 15.824,32.106 16.028,31.901 17.163,31.895
  region net +8: 3.962,50.698
  region net +8: 34.696,48.006 36.375,48.006 36.982,47.398 38.177,47.398 38.496,47.717 38.497,48.961 38.182,49.276 36.795,49.276 36.49,48.971 34.696,48.971 34.493,48.768 34.493,48.209
Bottom Layer:
  region net PhC: 23.114,53.315 24.968,53.315 33.689,62.035 ccw(c31.358,64.365) 34.654,64.365 34.654,72.837 34.389,73.101 32.105,73.101 31.876,72.87 31.877,72.549 31.877,63.729 23.114,54.965
  region net +8: 18.521,50.673 18.816,50.673 20.218,49.276 38.182,49.276 38.495,48.963 38.495,47.716 38.177,47.398 36.983,47.398 36.746,47.634 19.815,47.634 cw(c19.815,50.165) 18.025,48.375 17.272,49.128 17.272,49.424
  region net NetBAT1_3: 13.919,38.354 18.288,38.354 19.115,37.527 19.115,32.221 18.542,31.648 15.951,31.648 15.412,32.187 15.412,33.477 14.549,34.341 14.099,34.341 13.613,34.826 13.605,37.883 cw(c14.115,37.884)
  region net +8: 6.335,31.532 4.181,31.532 3.742,31.97 3.742,51.139 4.318,51.714 9.28,51.714 9.821,51.173 9.821,48.962 9.322,48.463 7.315,48.463 5.486,46.634 5.486,43.375 6.756,42.104 6.756,31.953
  region net +8: 36.982,47.398 38.177,47.398 38.396,47.617 36.744,47.634
  region net GND: 36.982,47.397
  region net GND: 4.166,16.104
  region net GND: 4.369,16.307
  region net GND: 4.369,16.307
  region net GND: 8.687,37.998
  region net GND: 26.162,58.166
  region: 14.478,37.033
  region: 14.63,37.338

## Silkscreen, mask and mechanical layers (free items; w line width, h text height)
Top Overlay:
  region: 3.708,38.1
  region: 3.708,34.188
  text "VCC" at 9.47,54 h1.52
  text "GND" at 7.465,40.843 h1.52
  text "VDD" at 46.685,28.55 h1.52
  text "SWC" at 46.711,26.636 h1.52
  text "GND" at 46.787,24.636 h1.52
  text "SWD" at 46.711,22.631 h1.52
  text "NRST" at 46.484,20.436 h1.52
  text "SWO" at 46.691,18.35 h1.52
  text "CS" at 21.92,2.007 h1.52
  text "CK" at 19.558,1.981 h1.52
  text "MI" at 17.907,1.956 h1.52
  text "GND" at 8.585,1.905 h1.52
  text "MO" at 15.519,1.905 h1.52
  text "VCC" at 11.887,1.88 h1.52
  text "TX" at 26.137,1.803 h1.52
  text "RX" at 28.423,1.803 h1.52
  text "RX" at 35.435,1.673 h1.52
  text "TX" at 37.44,1.6 h1.52
  text "3.3V" at 32.36,1.422 h1.52

## Dimensions
50.648,75.844 to 50.648,0 on Top Overlay